# EAGLE board connboard (EAGLE 5.07)
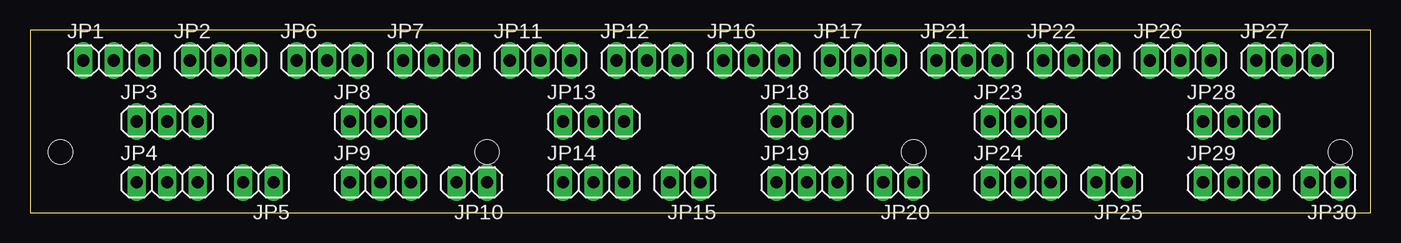
[diagram p0: board, top side]
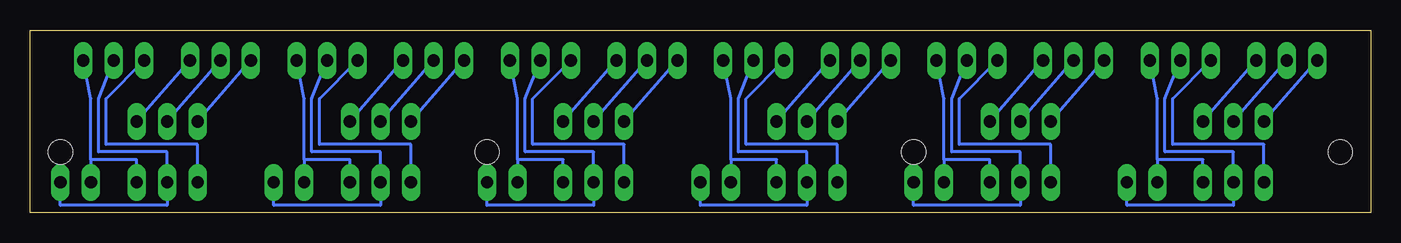
[diagram p1: board, bottom side, seen from below]

Size 111.76 x 15.24 mm. Coordinates in mm from the lower left corner, seen from the top.
Outline: 0,15.24 0,0 111.76,0 111.76,15.24 0,15.24
Copper layers (1*16): Top 0.035mm / dielectric 1.5mm / Bottom 0.035mm
Design rules "default": minimum track width 10mil, minimum drill 24mil, track to track 8mil, track to pad 8mil, pad to pad 8mil, via to via 8mil, smd to smd 8mil, copper to edge 40mil, drill to drill 8mil, minimum pad ring 10mil, minimum via ring 8mil, stop-mask expansion 4mil, vias tented up to drill 0mil, thermal gap 10mil
Holes 2 mm at 2.54,5.08 38.1,5.08 73.66,5.08 109.22,5.08

## Footprints (pad centres in the part's own frame; a part is rotated, then mirrored left to right if it is on the bottom)
1X03 = drill 1.016 long: 1 -2.54,0; 2 0,0; 3 2.54,0
1X02 = drill 1.016 long: 1 -1.27,0; 2 1.27,0

## Placement (x,y rotation side)
JP1  [1X03]  6.99,12.7 0 top
JP2  [1X03]  15.88,12.7 0 top
JP3  [1X03]  11.43,7.62 0 top
JP4  [1X03]  11.43,2.54 0 top
JP5  [1X02]  19.05,2.54 180 top
JP6  [1X03]  24.77,12.7 0 top
JP7  [1X03]  33.66,12.7 0 top
JP8  [1X03]  29.21,7.62 0 top
JP9  [1X03]  29.21,2.54 0 top
JP10  [1X02]  36.83,2.54 180 top
JP11  [1X03]  42.55,12.7 0 top
JP12  [1X03]  51.44,12.7 0 top
JP13  [1X03]  46.99,7.62 0 top
JP14  [1X03]  46.99,2.54 0 top
JP15  [1X02]  54.61,2.54 180 top
JP16  [1X03]  60.33,12.7 0 top
JP17  [1X03]  69.22,12.7 0 top
JP18  [1X03]  64.77,7.62 0 top
JP19  [1X03]  64.77,2.54 0 top
JP20  [1X02]  72.39,2.54 180 top
JP21  [1X03]  78.11,12.7 0 top
JP22  [1X03]  87,12.7 0 top
JP23  [1X03]  82.55,7.62 0 top
JP24  [1X03]  82.55,2.54 0 top
JP25  [1X02]  90.17,2.54 180 top
JP26  [1X03]  95.89,12.7 0 top
JP27  [1X03]  104.78,12.7 0 top
JP28  [1X03]  100.33,7.62 0 top
JP29  [1X03]  100.33,2.54 0 top
JP30  [1X02]  107.95,2.54 180 top

## Library data of the parts
JP1-JP30 = pinhead

## Nets
N$1: JP1.1 JP3.1
N$2: JP1.2 JP3.2
N$3: JP1.3 JP3.3
N$4: JP2.1 JP4.1
N$5: JP2.2 JP4.2 JP5.1
N$6: JP2.3 JP4.3 JP5.2
N$7: JP6.1 JP8.1
N$8: JP6.2 JP8.2
N$9: JP6.3 JP8.3
N$10: JP7.1 JP9.1
N$11: JP7.2 JP9.2 JP10.1
N$12: JP7.3 JP9.3 JP10.2
N$13: JP11.1 JP13.1
N$14: JP11.2 JP13.2
N$15: JP11.3 JP13.3
N$16: JP12.1 JP14.1
N$17: JP12.2 JP14.2 JP15.1
N$18: JP12.3 JP14.3 JP15.2
N$19: JP16.1 JP18.1
N$20: JP16.2 JP18.2
N$21: JP16.3 JP18.3
N$22: JP17.1 JP19.1
N$23: JP17.2 JP19.2 JP20.1
N$24: JP17.3 JP19.3 JP20.2
N$25: JP21.1 JP23.1
N$26: JP21.2 JP23.2
N$27: JP21.3 JP23.3
N$28: JP22.1 JP24.1
N$29: JP22.2 JP24.2 JP25.1
N$30: JP22.3 JP24.3 JP25.2
N$31: JP26.1 JP28.1
N$32: JP26.2 JP28.2
N$33: JP26.3 JP28.3
N$34: JP27.1 JP29.1
N$35: JP27.2 JP29.2 JP30.1
N$36: JP27.3 JP29.3 JP30.2

## Tracks (layer width: path | path; a pad name or v marks a point on that pad's centre or on a via)
N$1
  Bottom 0.254: JP1.1 JP3.1
N$2
  Bottom 0.254: JP1.2 JP3.2
N$3
  Bottom 0.254: JP1.3 JP3.3
N$4
  Bottom 0.254: JP2.1 16.51,9.53 16.51,5.71 8.89,5.71 JP4.1
N$5
  Bottom 0.254: JP2.2 17.14,9.53 17.14,5.08 11.43,5.08 JP4.2 11.43,0.64 20.32,0.64 JP5.1
N$6
  Bottom 0.254: JP2.3 17.78,9.53 17.78,4.45 | 17.78,4.45 13.97,4.45 JP4.3 | 17.78,4.45 JP5.2
N$7
  Bottom 0.254: JP6.1 JP8.1
N$8
  Bottom 0.254: JP6.2 JP8.2
N$9
  Bottom 0.254: JP6.3 JP8.3
N$10
  Bottom 0.254: JP7.1 34.29,9.53 34.29,5.71 26.67,5.71 JP9.1
N$11
  Bottom 0.254: JP7.2 34.92,9.53 34.92,5.08 29.21,5.08 JP9.2 29.21,0.64 38.1,0.64 JP10.1
N$12
  Bottom 0.254: JP7.3 35.56,9.53 35.56,4.45 | 35.56,4.45 31.75,4.45 JP9.3 | 35.56,4.45 JP10.2
N$13
  Bottom 0.254: JP11.1 JP13.1
N$14
  Bottom 0.254: JP11.2 JP13.2
N$15
  Bottom 0.254: JP11.3 JP13.3
N$16
  Bottom 0.254: JP12.1 52.07,9.53 52.07,5.71 44.45,5.71 JP14.1
N$17
  Bottom 0.254: JP12.2 52.7,9.53 52.7,5.08 46.99,5.08 JP14.2 46.99,0.64 55.88,0.64 JP15.1
N$18
  Bottom 0.254: JP12.3 53.34,9.53 53.34,4.45 | 53.34,4.45 49.53,4.45 JP14.3 | 53.34,4.45 JP15.2
N$19
  Bottom 0.254: JP16.1 JP18.1
N$20
  Bottom 0.254: JP16.2 JP18.2
N$21
  Bottom 0.254: JP16.3 JP18.3
N$22
  Bottom 0.254: JP17.1 69.85,9.53 69.85,5.71 62.23,5.71 JP19.1
N$23
  Bottom 0.254: JP17.2 70.48,9.53 70.48,5.08 64.77,5.08 JP19.2 64.77,0.64 73.66,0.64 JP20.1
N$24
  Bottom 0.254: JP17.3 71.12,9.53 71.12,4.45 | 71.12,4.45 67.31,4.45 JP19.3 | 71.12,4.45 JP20.2
N$25
  Bottom 0.254: JP21.1 JP23.1
N$26
  Bottom 0.254: JP21.2 JP23.2
N$27
  Bottom 0.254: JP21.3 JP23.3
N$28
  Bottom 0.254: JP22.1 87.63,9.53 87.63,5.71 80.01,5.71 JP24.1
N$29
  Bottom 0.254: JP22.2 88.27,9.53 88.27,5.08 82.55,5.08 JP24.2 82.55,0.64 91.44,0.64 JP25.1
N$30
  Bottom 0.254: JP22.3 88.9,9.53 88.9,4.45 | 88.9,4.45 85.09,4.45 JP24.3 | 88.9,4.45 JP25.2
N$31
  Bottom 0.254: JP26.1 JP28.1
N$32
  Bottom 0.254: JP26.2 JP28.2
N$33
  Bottom 0.254: JP26.3 JP28.3
N$34
  Bottom 0.254: JP27.1 105.41,9.53 105.41,5.71 97.79,5.71 JP29.1
N$35
  Bottom 0.254: JP27.2 106.05,9.53 106.05,5.08 100.33,5.08 JP29.2 100.33,0.64 109.22,0.64 JP30.1
N$36
  Bottom 0.254: JP27.3 106.68,9.53 106.68,4.45 | 106.68,4.45 102.87,4.45 JP29.3 | 106.68,4.45 JP30.2